# Altium PCB LYSZ-220526_s.PcbDoc
Units mil, origin at the board's own origin, x right, y up, seen from the top; angles counter-clockwise.
Board outline 3123 x 1109 mil, 2 copper layers (Top Layer, Bottom Layer); 63 components, 60 nets, 315 pads, 149 vias.
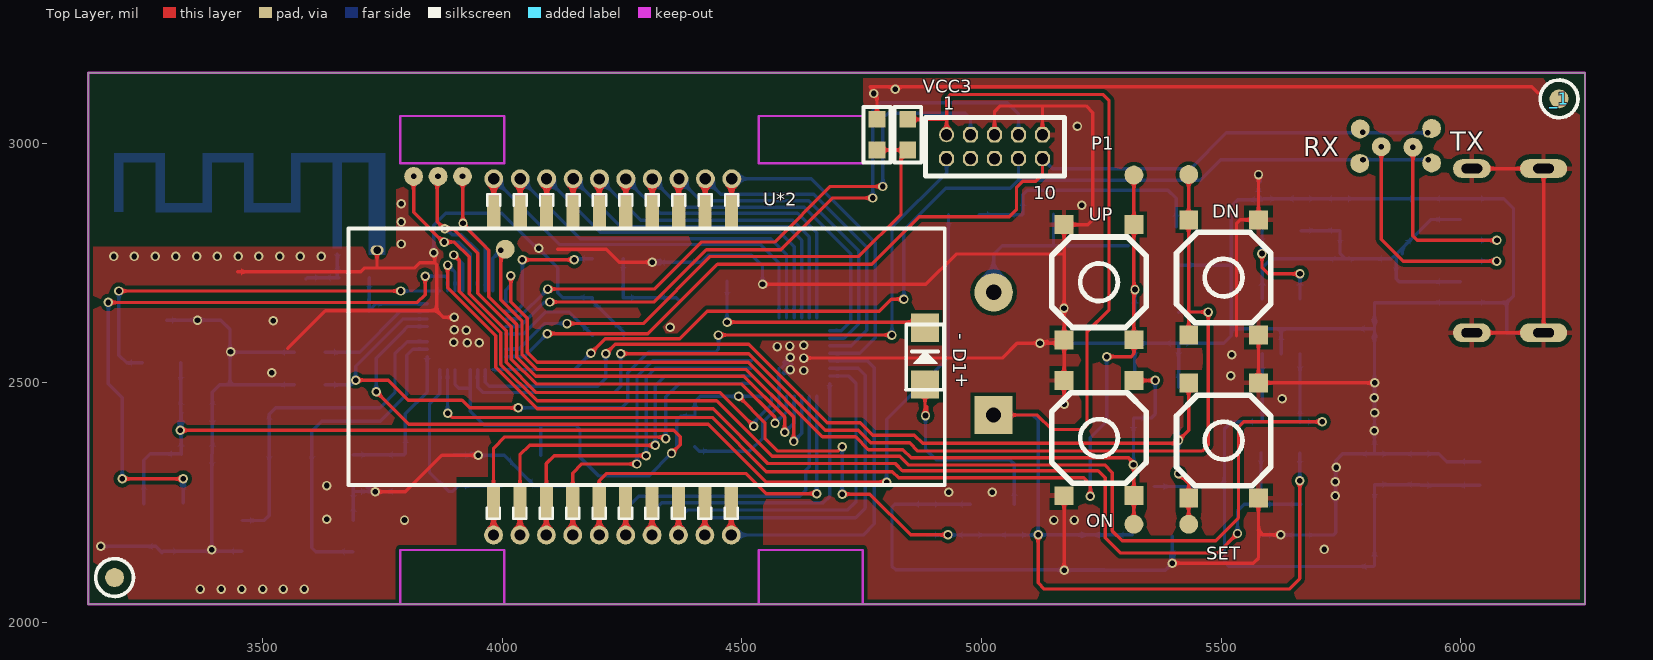
[diagram p0: Top Layer view]
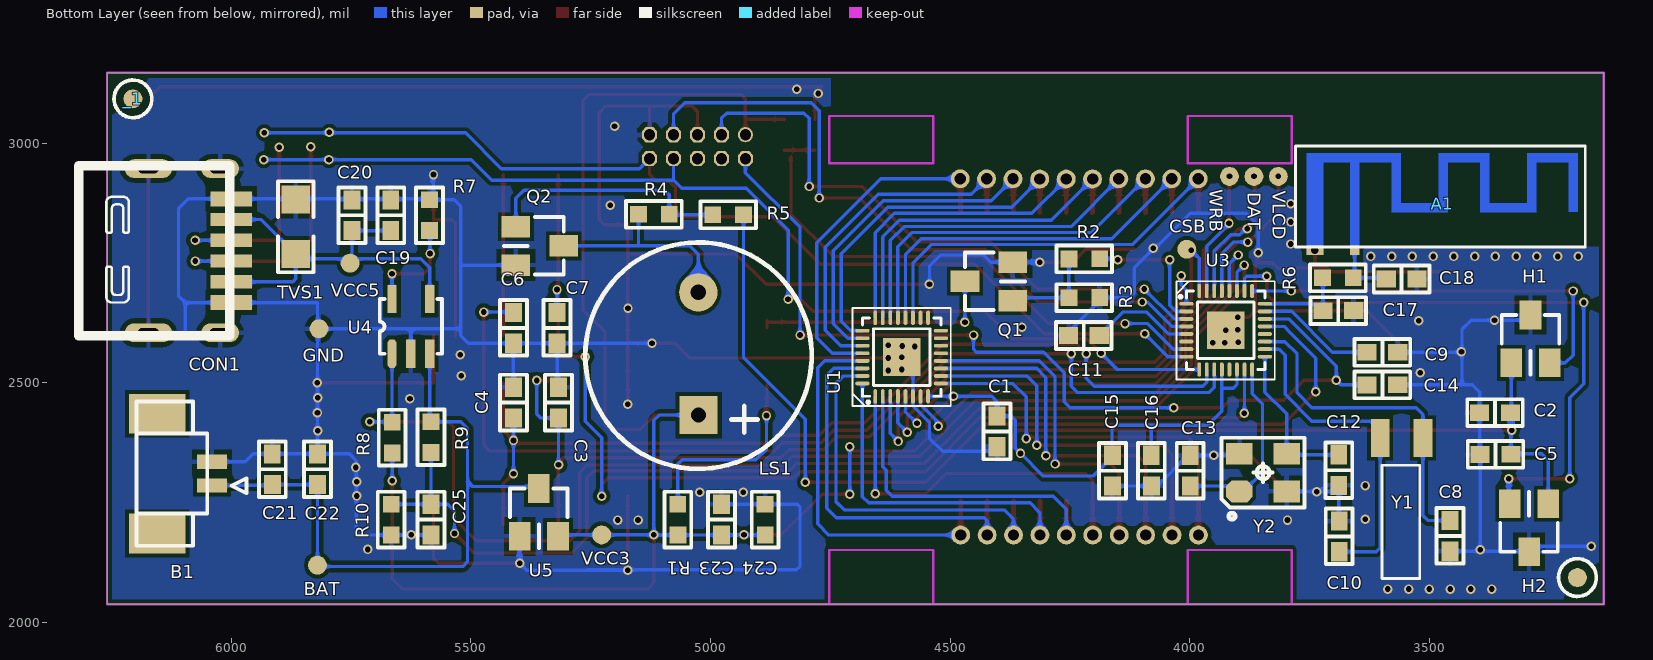
[diagram p1: Bottom Layer view, seen from below]
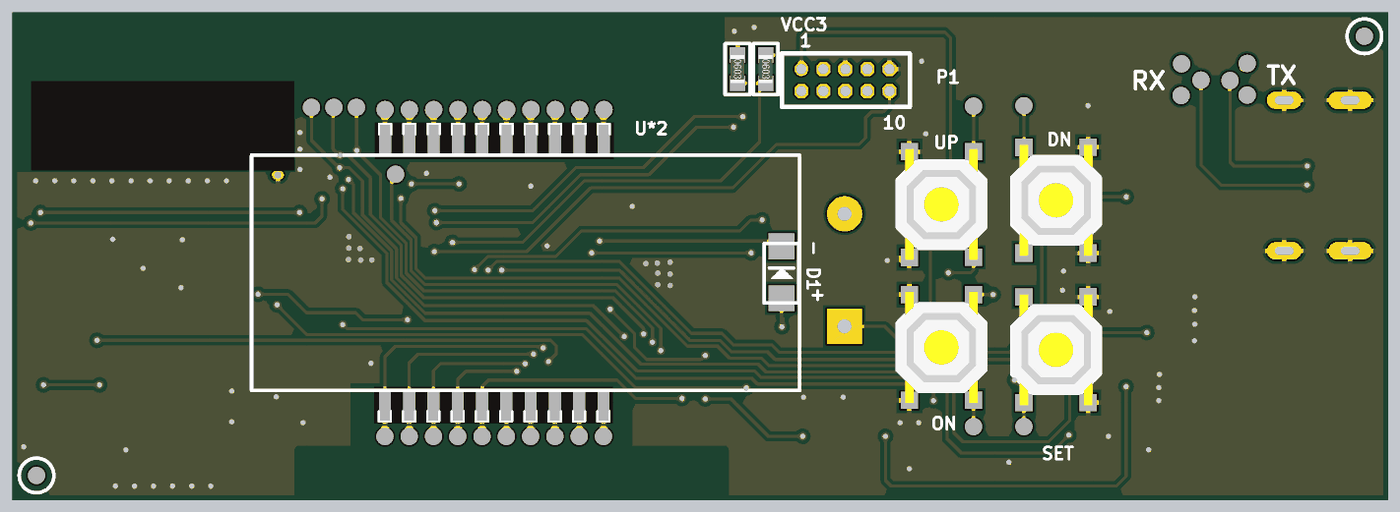
[diagram p2: 3D render of the assembled board from above, using the file's embedded part models]
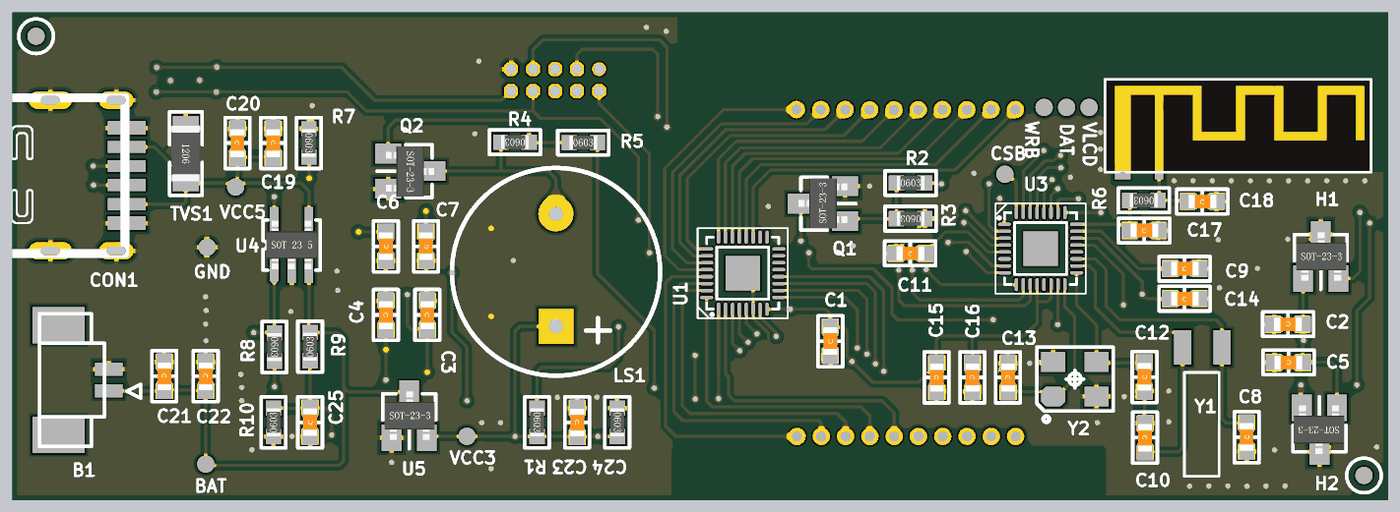
[diagram p3: 3D render of the assembled board from below, using the file's embedded part models]

## Layer stack, top to bottom
Top Solder: solder mask 0.4, Solder Resist, Dk 3.5
Top Layer: signal copper 1.4
Dielectric 1: dielectric 12.6, FR-4, Dk 4.8
Bottom Layer: signal copper 1.4
Bottom Solder: solder mask 0.4, Solder Resist, Dk 3.5

## Board outline
3136,2038 3136,3147 6259,3147 6259,2038

## Design rules (kind name [scope] priority, off if disabled: settings)
Clearance [All] p1: gap=8 ignorepadtopadclearanceinfootprint=FALSE
PolygonConnect PolygonConnect_1 [All vs IsVia] p1: connectstyle=Direct reliefconductorwidth=10 reliefentries=4 polygonreliefangle="90 Angle" airgapwidth=10
PolygonConnect [All] p2: connectstyle=Relief reliefconductorwidth=10 reliefentries=4 polygonreliefangle="90 Angle" airgapwidth=10
RoutingVias [All] p1: holewidth=11.81 width=19.68 viastyle="Through Hole" minholewidth=11.81 minwidth=19.68 maxholewidth=11.81 maxwidth=19.68
SilkToBoardRegionClearance [All] p1 off:
SilkToSilkClearance [All] p1 off: silktosilkclearance=10
SilkToSolderMaskClearance [IsPad] p1 off: minsilkscreentomaskgap=10 clearancetoexposedcopper=TRUE
SolderMaskExpansion [All] p1 off: expansion=4
Width [All] p1: maxlimit=20 minlimit=7 preferedwidth=7
27 further rules are at their usual default settings.

## Classes and differential pairs
component class Designator: B1 C19 C20 C21 C22 C23 C24 C25 CON1 R7 R8 R9 R10 TVS1 U4 U5

## Components (designator, comment, footprint, x,y, rotation, side; value= is the part's Value field where it differs from the comment)
_1 "" MAK 6205,3092.77 r270 top
_1 "" MAK 6205,3092.77 r270 bottom
A1 "2_0.4G_PIFA_F" BT-ANT 3656,2777 r0 bottom
B1 "Battery 4.2V" JP2S 6097,2311 r0 bottom
C1 "Cap" 0603-C 4402,2399 r90 bottom
C2 "Cap" 0603-C 3363,2438 r0 bottom
C3 "Cap" 0603-C 5317,2459 r270 bottom
C4 "Cap" 0603-C 5411,2459 r270 bottom
C5 "Cap" 0603-C 3362,2351 r0 bottom
C6 "Cap" 0603-C 5411,2615 r90 bottom
C7 "Cap" 0603-C 5320,2615 r90 bottom
C8 "Cap" 0603-C 3457,2181 r90 bottom
C9 "Cap" 0603-C 3598,2564 r180 bottom
C10 "Cap" 0603-C 3688,2180 r270 bottom
C11 "Cap" 0603-C 4221,2599 r180 bottom
C12 "Cap" 0603-C 3689,2318 r90 bottom
C13 "Cap" 0603-C 3999,2317 r270 bottom
C14 "Cap" 0603-C 3598,2496 r180 bottom
C15 "Cap" 0603-C 4161,2317 r270 bottom
C16 "Cap" 0603-C 4080,2317 r270 bottom
C17 "Cap" 0603-C 3690,2651 r180 bottom
C18 "Cap" 0603-C 3558,2717 r180 bottom
C19 "100nF" 0603-C 5667,2850 r270 bottom
C20 "4.7uF" 0603-C 5748,2850 r270 bottom
C21 "10UF" 0603-C 5914,2320 r270 bottom
C22 "100nF" 0603-C 5820,2320 r270 bottom
C23 "10uF" 0603-C 4976.91,2214.88 r270 bottom
C24 "100nF" 0603 4885.82,2214.88 r270 bottom
C25 "100nF" 0603-C 5583,2214.88 r90 bottom
CON1 "CON5" USB-C 6086,2776 r0 bottom
D1 "LED" LED-3020 4882,2556 r270 top
DN "Down_key" KEY-SMD5.2 5505,2720 r270 top
H1 "SV236" SOT-23 3289,2592 r180 bottom
H2 "SV236" SOT-23 3292,2198 r0 bottom
LS1 "Bell" BELL12*6 5025,2561 r90 bottom
ON "Power_key" KEY-SMD5.2 5245,2385 r90 top
P1 "Debug connecter 1.27mm" SIP5-1.27 5027,2993 r0 top
Q1 "8050" SOT-23 4419,2712 r90 bottom
Q2 "8050" SOT-23 5356,2786 r270 bottom
R1 "Res2" 0603 5068,2214.88 r270 bottom
R2 "Res2" 0603 4220,2759 r180 bottom
R3 "100K" 0603 4220,2678 r0 bottom
R4 "100K" 0603 5118,2852 r0 bottom
R5 "Res2" 0603 4963,2851 r180 bottom
R6 "0" 0603 3690.84,2719.5 r0 bottom
R7 "10K" 0603 5586,2850 r270 bottom
R8 "1M" 0603 5664,2386 r270 bottom
R9 "1M" 0603 5583,2387 r90 bottom
R10 "1M" 0603 5666,2214.88 r90 bottom
SET "Set_key" KEY-SMD5.2 5505,2380 r270 top
TVS1 "TVS" 1206 5865,2826 r270 bottom
U1 "U*" QFN32-4*4 4601,2554 r90 bottom
U3 "U*" QFN32-4*4 3925,2610 r180 bottom
U4 "SV4054" SOT-25 5625,2618 r180 bottom
U5 "XC6206P302" SOT-23 5358,2230 r180 bottom
U*2 "DY10550-TTA" LCD-20-1.4 4230,2555 r0 top locked
UP "Up_key" KEY-SMD5.2 5245,2710 r90 top
Y1 "32.768kHz" 32768 3558,2385 r90 bottom
Y2 "16MHz" JZ-3225 3847,2313 r90 bottom
? "" MAK 3191,2094 r270 bottom
? "" MAK 3191,2094 r270 top
? "" 0603 4782,3018 r270 top
? "" 0603 4846,3018 r270 top

## Footprints (in the part's own frame and the unit in brackets; to place one, negate y for a bottom-side part, rotate by r counter-clockwise, add the part's x,y. Pads: shape width x height; smd on the part's side, far side on the other; paste and mask are expansions set on the pad)
0603 [mil]
  rect 35x35 smd: 1(-32.09,-0.07) 2(32.09,0.07)
  silkscreen extent -58,-28 58,28, body extent -32,-16 31,16, height 18
0603-C [mil]
  rect 40x35 smd: 1(-32.09,-0.07) 2(32.09,0.07)
  silkscreen extent -58,-28 58,28, body extent -51,-19 52,20, height 35
1206 [mil]
  rect 58x60 smd: 1(-57,0) 2(57,0)
  silkscreen extent -95,-37 95,37, body extent -63,-32 63,31, height 24
32768 [mm]
  rect 2x1 smd: 1(0,1.13) 2(0,-1.13)
  silkscreen extent -7.44,-0.97 -1.44,1.03
BELL12*6 [mil]
  rect 80x80 hole 32: 1(-127.95,-0.16)
  round 80 hole 32: 2(127.95,0.16)
  silkscreen extent -240,-236 232,236, body extent -237,-236 233,236, height 354
BT-ANT [mm]
  rect 0.5x0.5 smd: 1(0,0)
  rect 0.9x0.5 on Bottom Solder: 2(2.1,0)
  oval 0.7x0.5 hole 0.4: 2(2.1,0)
  rect 0.9x0.5 smd: 2(2.1,0)
  rect 0.5x0.5 on Bottom Solder: ""(-11.6,-4.9) ""(-11.59,-2.29) ""(-9.4,-4.9) ""(-9.4,-2.26) ""(-6.9,-2.26) ""(-6.9,-4.9) ""(-4.7,-4.9) ""(-4.7,-2.26) ""(-2.2,-4.9) ""(-2.2,-2.26) ""(0,-4.4) ""(0,0) ""(2.3,-4.9)
  Top Layer region: -6.65,-2.01 -6.65,-5.15 -7.15,-5.15 -7.15,-2.01
  Top Layer region: -4.449,-4.65 -4.449,-5.15 -7.15,-5.15 -7.15,-4.65
  Top Layer region: -4.449,-2.01 -4.449,-5.15 -4.95,-5.15 -4.95,-2.01
  Top Layer region: -1.951,-2.01 -1.951,-2.51 -4.951,-2.51 -4.951,-2.01
  Top Layer region: 2.547,0.253 2.547,-5.147 1.648,-5.147 1.648,0.253
  Top Layer region: 0.251,-0.092 0.251,-4.9 -0.25,-4.9 -0.25,-0.092
  Top Layer region: -1.948,-2.013 -1.948,-5.153 -2.448,-5.153 -2.448,-2.013
  Top Layer region: -9.15,-2.01 -9.15,-5.15 -9.65,-5.15 -9.65,-2.01
  Top Layer region: -9.65,-2.51 -9.65,-2.01 -6.949,-2.01 -6.949,-2.51
  Top Layer region: -9.153,-4.651 -9.153,-5.15 -11.853,-5.15 -11.853,-4.651
  Top Layer region: -11.347,-2.025 -11.347,-5.155 -11.847,-5.155 -11.847,-2.025
  Top Layer lines w0.5: -2.2,-4.9 2.3,-4.9
  silkscreen extent -12.23,-5.53 3.12,-0.18
JP2S [mm]
  rect 1.6x0.75 smd: 1(-1.45,0.625) 2(-1.45,-0.625)
  rect 3x2.1 smd: ""(1.45,-3.175) ""(1.45,3.175)
  silkscreen extent -3.28,-3.82 2.55,3.83
JZ-3225 [mm]
  oct 1.15x1.4 smd: 1(-1,1.25)
  rect 1.15x1.4 smd: 2(-1,-1.25) 3(1,-1.25) 4(1,1.25)
  silkscreen extent -2.47,-2.2 1.85,2.2
KEY-SMD5.2 [mm]
  rect 1x1 smd: 1(-3.045,-1.85) 1(3.055,-1.85) 2(-3.055,1.85) 2(3.055,1.85)
  silkscreen extent -2.39,-2.5 2.41,2.5, body extent -3.2,-2.63 3.2,2.62, height 1.5
LCD-20-1.4 [mm]
  rect 0.7x1.8 smd: 1(-6.305,-7.64) 2(-4.905,-7.64) 3(-3.505,-7.64) 4(-2.105,-7.64) 5(-0.705,-7.64) 6(0.695,-7.64) 7(2.095,-7.64) 8(3.495,-7.64) 9(4.895,-7.64) 10(6.295,-7.64) 11(6.305,7.64) 12(4.905,7.64) 13(3.505,7.64) 14(2.105,7.64) 15(0.705,7.64) 16(-0.695,7.64) 17(-2.095,7.64) 18(-3.495,7.64) 19(-4.895,7.64) 20(-6.295,7.64)
  silkscreen extent -6.66,-8.6 6.66,8.6
LED-3020 [mm]
  rect 1.5x1.5 smd: A(1.5,0) K(-1.5,0)
  silkscreen extent -1.68,-1 1.78,1, body extent -2.36,-0.77 1.84,0.83, height 1
MAK [mm]
  round 1 smd: ""(0,0)
  Top Layer pour cut-out: -1,0 -0.924,-0.383 -0.707,-0.707 -0.383,-0.924 0,-1 0,-1 0.383,-0.924 0.707,-0.707 0.924,-0.383 1,0 1,0 0.924,0.383 0.707,0.707 0.383,0.924 0,1 0,1 -0.383,0.924 -0.707,0.707 -0.924,0.383 -1,0
  silkscreen extent -1,-1 1,1
QFN32-4*4 [mm]
  oval 0.76x0.2 smd: 1(-2.08,1.4) 2(-2.08,1) 3(-2.08,0.6) 4(-2.08,0.2) 5(-2.08,-0.2) 6(-2.08,-0.6) 7(-2.08,-1) 8(-2.08,-1.4) 17(2.08,-1.4) 18(2.08,-1) 19(2.08,-0.6) 20(2.08,-0.2) 21(2.08,0.2) 22(2.08,0.6) 23(2.08,1) 24(2.08,1.4)
  oval 0.2x0.76 smd: 9(-1.4,-2.08) 10(-1,-2.08) 11(-0.6,-2.08) 12(-0.2,-2.08) 13(0.2,-2.08) 14(0.6,-2.08) 15(1,-2.08) 16(1.4,-2.08) 25(1.4,2.08) 26(1,2.08) 27(0.6,2.08) 28(0.2,2.08) 29(-0.2,2.08) 30(-0.6,2.08) 31(-1,2.08) 32(-1.4,2.08)
  rect 2x2 smd: 33(0,0)
  silkscreen extent -2.6,-2.6 2.6,2.6
SIP5-1.27 [mm]
  round 0.8 hole 0.6: 1(-2.54,0.635)
  oct 0.8x0.8 hole 0.6: 2(-2.54,-0.635) 3(-1.27,0.635) 4(-1.27,-0.635) 5(0,0.635) 6(0,-0.635) 7(1.27,0.635) 8(1.27,-0.635) 9(2.54,0.635) 10(2.54,-0.635)
  silkscreen extent -3.66,-1.55 3.71,1.55
SOT-23 [mil]
  rect 45x60 smd: 1(-40,-50) 2(0,50) 3(40,-50)
  silkscreen extent -60,-75 60,50, body extent -56,-55 58,55, height 47
SOT-25 [mm]
  oct 0.5x1.5 smd: 1(-1,-1.45)
  rect 0.5x1.5 smd: 2(0,-1.45) 3(1,-1.45) 4(1,1.45) 5(-1,1.45)
  silkscreen extent -1.65,-1.45 1.65,1.45, body extent -1.45,-1.4 1.45,1.4, height 1.2
USB-C [mm]
  rect 2.2x0.8 smd: 1(-2.2,2.75) 6(-2.2,-2.75)
  rect 2.2x0.7 smd: 2(-2.2,1.65) 3(-2.2,0.55) 4(-2.2,-0.55) 5(-2.2,-1.65)
  oval 2x1 hole 0.5 slot 1.1 at 0 deg: ""(-1.6,-4.35) ""(-1.6,4.35)
  oval 2.5x1 hole 0.5 slot 1.1 at 0 deg: ""(2.2,4.35) ""(2.2,-4.35)
  silkscreen extent -2.1,-4.5 5.9,4.5

## Part data
B1: library part Battery, "Multicell Battery"
C1 C2 C3 C4 C5 C6 C7 C8 C9 C10 C11 C12 C13 C14 C15 C16 C17 C18: "Capacitor"
C19 C20 C21 C22 C23 C24 C25: library part CAP, "Capacitor"
CON1: "Connector"
DN ON SET UP: library part SW-PB, "Switch"
H1 H2: library part "霍尔44E 938"
LS1: "Electrical Bell"
P1: library part "Header 5X2", "Header, 5-Pin, Dual row"
Q1 Q2: library part NPN, "NPN Transistor"
R1 R2 R5: "Resistor"
R3 R4 R6: library part Res2, "Resistor"
R7: library part Res2, "1%@100mA"
R8 R9 R10: library part Res2
U1: library part VK1088
U3: library part PHY6222
Y1 Y2: library part XTAL, "Crystal Oscillator"

## Free pads (board coordinates)
  round 39.37 smd: 0(3982.17,2926) 1(4037.37,2926) 2(4092.57,2926) 3(4147.78,2926) 4(4202.98,2926) 5(4258.18,2926) 6(4313.39,2926) 7(4368.59,2926) 8(4423.8,2926) 9(4479,2926) 10(3981.77,2182.77) 11(4036.89,2182.77) 12(4092.01,2182.77) 13(4147.13,2182.77) 14(4202.24,2182.77) 15(4257.36,2182.77) 16(4312.48,2182.77) 17(4367.6,2182.77) 18(4422.72,2182.77) 19(4477.83,2182.77) 40(5790,3030) 41(5834,2993) 42(5789,2958) 43(5939,3031) 44(5900,2992) 45(5939,2959) 46(3917,2931) 47(3866,2931) 48(3815,2931) 49(4006,2779) 58(5317.83,2933.83) 59(5432.17,2934.83) 60(5317.83,2205.17) 61(5432.17,2205.17)
  round 39.37 hole 23.62: 20(3982.17,2926) 21(4037.37,2926) 22(4092.4,2925.83) 23(4147.78,2926) 24(4202.64,2925.66) 25(4257.76,2925.57) 26(4312.87,2925.49) 27(4368.59,2926) 28(4423.8,2926) 29(4479,2926) 30(4477.83,2182.77) 31(4422.72,2182.77) 32(4367.6,2182.77) 33(4312.48,2182.77) 34(4257.36,2182.77) 35(4202.24,2182.77) 36(4147.13,2182.77) 37(4092.01,2182.77) 38(4036.89,2182.77) 39(3981.77,2182.77)
  round 39.37 smd far side: 50(4006,2779) 51(3917,2931) 52(3866,2931) 53(3815,2931) 54(5752,2750) 55(5816.73,2613) 56(5819.93,2119.93) 57(5227,2183)

## Via types
v1: diameter 19.68, hole 11.81, Top Layer to Bottom Layer, tented both sides, 149 vias

## Nets (pads, with @x,y where several pads share a name; then routed paths per layer and width w, separated by ;. In a path a pad name is that pad's centre, name@x,y a point inside that pad or via, vN(x,y) a via of type N, cw(c..) or ccw(c..) an arc to the next point about the centre after c; other vN are vias at no path point)
BAT_ADC: C25.2 R9.1 R10.2 U3.27 | length 2406.5
  Top Layer w7: v1(3886,2746) 3886,2699 3986,2599 3986,2533 4073,2446 4440,2446 4554,2332 4820,2332 4835,2317 5243,2317 5258,2302 5258,2176.83 5289.49,2145.34 5493.34,2145.34 v1(5534,2186)
  Bottom Layer w7: v1(3886,2746) 3901.38,2730.62 U3.27 ; v1(5534,2186) 5534,2233 5547.97,2246.97 C25.2 ; R9.1 5583.07,2354.78 C25.2 ; R10.2 C25.2
CHRG: R8.1 U3.28 U4.1 | length 2692.9
  Top Layer w7: v1(3899,2767) 3910,2756 3910,2691.44 3997,2604.44 3997,2538.44 4072.44,2463 4447,2463 4563,2347 4829,2347 4847,2329 5257,2329 5273,2313 5273,2191.14 5293.41,2170.73 5488.54,2170.73 5536,2218.18 5536,2408 5547,2419 v1(5711,2419)
  Bottom Layer w7: v1(3899,2767) 3917.13,2748.87 U3.28 ; U4.1 5664.37,2418.39 5664.98,2419 v1(5711,2419)
GND: ?.1@4781.93,3050.09 A1.2@3738.68,2777 B1.2 C1.1 C2.2 C3.1 C4.1 C5.2 C6.1 C7.1 C8.1 C9.2 C10.1 C11.1 C12.1 C13.1 C14.2 C15.2 C16.2 C17.2 C18.2 C19.1 C20.1 C21.1 C22.1 C23.1 C24.1 C25.1 CON1. CON1.1 CON1.6 DN.2 H1.2 H2.2 ON.2 P1.5 P1.9 pad.55 Q1.3 Q2.3 R3.1 R7.1 R10.1 SET.2 TVS1.1 U1.6 U1.33 U3.33 U4.2 U5.1 UP.2 Y2.2 Y2.4 | length 14676.2
  Top Layer w7: 3448,2732 3705,2732 3713,2740 3817,2740 3828,2751 3859,2751 ; 3552,2572 3631,2651 3863,2651 ; v1(3735,2273) 3798,2273 3874.09,2349.09 v1(3950,2349.09) ; 3738.68,2740.32 A1.2@3738.68,2777 ; v1@3859,2772 3859,2751 ; v1(3900,2637) 3877,2637 3863,2651 ; 4116,2779 4217,2779 4244,2752 v1(4313,2752) ; v1(4543,2706) 4884,2706 4947,2769 5170.17,2769 ; v1(4629,2552) 5043,2552 5073.91,2582.91 v1(5121.91,2582.91) 5165.35,2582.91 UP.2@5172.17,2589.72 ; ?.1@4781.93,3050.09 4781.93,3104.07 4768,3118 6148,3118 6160.5,3105.5 ; P1.5 5027,3066 5039,3078 5218,3078 5232,3064 5232,2841 5221.28,2830.28 5172.17,2830.28 UP.2@5172.17,2589.72 ; v1@5125.09,2588.41 ccw(c5132.74,2601.67) 5136.71,2586.88 ccw(c5140.67,2572.09) v1@5127.41,2579.74 ; P1.9 5127,3076.5 ; v1(5172.17,2109.17) ON.2@5172.17,2264.72 ; v1(5172.17,2455.83) 5172.17,2505.28 UP.2@5172.17,2589.72 ; v1(5398,2124) 5567,2124 5577.83,2134.83 5577.83,2192.17 ; 5532,2598 5532,2833 5539.28,2840.28 5577.83,2840.28 v1(5577.83,2934.83) ; SET.2@5577.83,2259.72 5577.83,2192.17 ; DN.2@5577.83,2599.72 5577.83,2500.28 v1(5820.28,2500.28) ; v1(5624,2183) 5587,2183 5577.83,2192.17 ; CON1.@6023.01,2604.74 6172.61,2604.74 6172.61,2947.26 CON1.@6023.01,2947.26 ; 3859,2751 3863,2747 3863,2651
  Bottom Layer w7: v1(3162,2159) 3277,2159 H2.2@3290,2146 ; H2.2@3292.91,2148.91 v1@3394.09,2148.91 ; H1.2@3299.93,2631.07 3412.42,2631.07 3431.91,2611.57 3431.91,2496.07 ; v1@3431.98,2564.07 C9.2 ; C8.1 v1@3394.09,2148.91 ; C14.2 3431.91,2496.07 ; C10.1@3688.93,2212.95 C12.1 ; C12.1@3689.56,2273.63 Y2.2 ; 3718.3,2281.71 cw(c3710.34,2263.13) v1@3729.11,2270.64 ; 3724.68,2278.98 ccw(c3728.77,2288.55) v1@3732.64,2278.89 ; v1(3857,2772) 3857,2829.18 3882.16,2854.34 3998.66,2854.34 v1@4074,2779 ; Y2.4@3899.5,2349.09 v1(3950,2349.09) C13.1 4003.91,2349.09 4068.09,2284.91 C16.2 C15.2 ; v1@3944.51,2345.91 ccw(c3931.25,2338.26) 3935.21,2353.05 ccw(c3939.17,2367.84) v1@3946.83,2354.58 ; v1(4076.07,2781.13) 4076.07,2779.93 4116,2740 4116,2688 4125.93,2678.07 R3.1 4187.91,2671.09 4253.09,2605.91 C11.1 ; v1(4313,2752) Q1.3 4415,2752 4430,2767 4520,2767 4543,2744 v1(4543,2706) ; v1@4316.17,2746.51 cw(c4324.99,2731.23) 4329.55,2748.27 ; v1@4316.17,2757.49 ccw(c4324.99,2772.77) 4329.55,2755.73 ; C1.1 4411.11,2357.74 4515.74,2357.74 4543,2385 4543,2418 4577.38,2452.38 U1.6 U1.33@4577.38,2530.38 ; U1.33@4584.49,2533.07 ccw(c4570.63,2552.73) U1.33@4594.66,2553.73 ; U1.33@4586.15,2521.59 cw(c4600.27,2511.07) U1.33@4601.03,2528.66 ; U1.33@4587.31,2543.33 ccw(c4576.84,2558.19) U1.33@4594.75,2555.08 ; U1.33@4588.45,2519.32 cw(c4597.02,2507.16) U1.33@4599.81,2521.77 ; U1.33@4588.66,2519.47 ccw(c4580.1,2531.62) U1.33@4594.75,2529.08 ; U1.33@4590.62,2545.66 cw(c4597.79,2535.49) U1.33@4599.92,2547.75 ; U1.33@4594.97,2540.46 ccw(c4585.88,2553.37) U1.33@4601.66,2554.03 ; U1.33@4597.73,2517.57 ccw(c4587.07,2527.53) U1.33@4601.66,2528.02 ; U1.33@4600.4,2527.74 cw(c4608.61,2531.25) U1.33@4604.45,2539.16 ; C23.1 C24.1 4818.97,2246.97 4813,2241 4813,2118 4821,2110 5257,2110 ; v1(5121.91,2582.91) C7.1 ; v1(5172.17,2109.17) 5383.17,2109.17 v1(5398,2124) U5.1 ; C3.1 5319.93,2493.95 C7.1 ; v1@5392.51,2127.17 ccw(c5377.23,2135.99) 5394.27,2140.55 ; 5401.73,2140.55 ccw(c5418.77,2135.99) v1@5403.49,2127.17 ; Q2.3 5516,2746 ; C4.1 5411.07,2582.78 C6.1 ; v1@5574.66,2929.34 cw(c5567.01,2916.08) 5581.79,2920.04 cw(c5596.59,2924) v1@5583.33,2931.66 ; v1(5577.83,2934.83) 5577.83,2890.32 R7.1 ; C25.1 R10.1 5733.8,2182.8 5739,2188 5739,2338 5753.09,2352.09 C22.1 ; U4.2 5625,2613 ; pad.55 5625,2613 ; B1.2 5970.39,2335.61 5953.91,2352.09 C21.1 C22.1 ; CON1.@6172.61,2604.73 6095.73,2604.73 6095.73,2667.73 ; v1@3394.09,2148.91 C5.2 3395.09,2351.93 C2.2 3395.09,2481.09 3410.07,2496.07 3431.91,2496.07 ; C7.1 C6.1 ; C6.1 5504.91,2582.91 5521,2599 5521,2613 ; 5521,2613 5521,2869 5534.09,2882.09 R7.1 ; 5521,2613 5625,2613 ; R7.1 5588.25,2884.27 CON1.6 6089.73,2884.27 6110,2864 6110,2682 6095.73,2667.73 ; C22.1 5819.73,2352.42 5819.73,2667.73 CON1.1 6095.73,2667.73
  other v1: 3370,2070 3413.3,2070 3456.6,2070 3499.9,2070 3543.2,2070 3586.5,2070 3394,2152 5715,2152.7 3796,2214 5151,2214 5193.27,2214 3634,2216 5738.28,2264.28 4931.81,2272 5022,2272 3634,2286 5738.28,2294 5740,2323.79 5819.28,2400.28 5820,2438 5627,2467 5819.28,2469.18 5520,2515 3519,2521 4629,2526 4601,2528 4601,2554 5522,2558.82 3433,2565 4574,2576 4600,2577 4629,2579 3927,2584 3952,2584 3899,2585 3925,2610 3900,2611 4350,2616 3522,2630 3364,2631 5172,2656 3189,2764 3232.3,2764 3275.6,2764 3318.9,2764 3362.2,2764 3405.5,2764 3448.8,2764 3492.1,2764 3535.4,2764 3578.7,2764 3622,2764 3789,2790 3789,2836 5209.31,2871 3789,2874 5200,3036 4775,3104 4820,3113
NetC3_2: C3.2 ON.1 pad.60 U3.1 | length 1984
  Top Layer w7: v1(4018,2724) 4018,2669 4052,2635 4052,2564 4073,2543 4513,2543 4668,2388 4737,2388 4764,2361 4836,2361 4853,2344 5307,2344 v1@5317.83,2333.17 ; pad.60 5317.83,2265.12 v1@5317.83,2329.07 ; ON.1@5317.83,2505.28 v1(5362.28,2505.28)
  Bottom Layer w7: U3.1 4006.89,2693.89 4018,2705 v1(4018,2724) ; v1(5316.93,2329.07) C3.2 5353.91,2426.91 5362.28,2435.28 v1(5362.28,2505.28)
NetC4_2: C4.2 pad.61 SET.1 U3.10 | length 1990.4
  Top Layer w7: v1(4216,2561) 4236,2581 4514,2581 4678,2417 4747,2417 4773,2391 4860,2391 4877,2374 5404.86,2374 v1(5410.93,2380.07) 5432.17,2401.3 SET.1@5432.17,2499.88 ; v1(5410.93,2310.93) 5432.17,2289.7 5432.17,2259.72 pad.61
  Bottom Layer w7: U3.10 3964.37,2501.63 3973,2493 4199,2493 4216,2510 v1(4216,2561) ; v1(5410.93,2310.93) v1(5410.93,2380.07) C4.2
NetC6_2: C6.2 DN.1 pad.59 U3.11 | length 2442.9
  Top Layer w7: v1(4247,2561) 4514,2561 4674,2401 4743,2401 4769,2375 4850,2375 4867,2358 5460,2358 5473,2371 v1(5473,2648) 5433.17,2648 ; DN.1@5432.17,2599.72 5432.17,2839.88 pad.59
  Bottom Layer w7: U3.11 3948.62,2491.38 3960,2480 4234,2480 4247,2493 v1(4247,2561) ; C6.2 5411.98,2648 v1(5473,2648)
NetC7_2: C7.2 pad.58 U3.15 UP.1 | length 2303.2
  Top Layer w7: v1(3886,2437) 3895,2428 4438,2428 4551,2315 4814,2315 4827,2302 5213,2302 5227,2288 v1(5227,2264) ; v1(5261,2555) 5312,2555 5317.83,2560.83 5317.83,2590.12 5317.83,2830.28 pad.58
  Bottom Layer w7: U3.15 3885.63,2437.37 v1(3886,2437) ; v1(5227,2264) 5227,2386 5261,2420 v1(5261,2555) ; C7.2 v1(5320.07,2694.93)
NetC9_1: C9.1 U3.23 | length 248.4
  Bottom Layer w7: C9.1 3702.1,2563.93 3787.54,2649.37 U3.23
NetC11_2: C11.2 U3.5 | length 221.3
  Bottom Layer w7: U3.5 4044.13,2602.13 4090,2648 4139.98,2648 C11.2
NetC15_1: 
NetC18_1: A1.1 C18.1 R6.1 | length 120.5
  Bottom Layer w7: C18.1 3592.72,2719.57 R6.1 3656,2722.33 A1.1@3656,2769.14
NetC19_2: C19.2 C20.2 CON1.2 CON1.5 pad.54 TVS1.2 U4.4 | length 877.9
  Bottom Layer w7: U4.4 5585.63,2740.63 5604,2759 pad.54@5759,2759 ; C19.2 C20.2 5747.93,2770.07 pad.54@5759,2759 ; TVS1.2@5877.5,2769 cw(c5907.68,2769) TVS1.2@5886.34,2790.34 ; CON1.2 5870.96,2711.04 5865,2717 TVS1.2 ; CON1.5 5936.96,2840.96 TVS1.2 ; pad.54@5759,2759 5855,2759 TVS1.2
NetD1_A: D1.A R1.1 | length 433.2
  Top Layer w7: D1.A 4882,2433 v1(4883,2432) ; 4885.89,2450.66 ccw(c4905.63,2446.02) v1@4888.39,2435.34
  Bottom Layer w7: v1(4883,2432) 4883,2362 4905,2340 5059,2340 5068.07,2330.93 R1.1
NetD1_K: D1.K Q1.2 | length 514.2
  Top Layer w7: v1(4469,2627) 4879,2627 4882,2630 D1.K
  Bottom Layer w7: v1(4469,2627) Q1.2
NetH1_3: H1.3 U3.25 | length 859.2
  Top Layer w7: v1(3200.11,2691.89) v1(3788.11,2691.89)
  Bottom Layer w7: v1(3200.11,2691.89) 3200.11,2557.89 3216,2542 H1.3 ; v1(3788.11,2691.89) U3.25
NetH2_3: H2.3 U3.26 | length 1377.1
  Top Layer w7: v1(3178,2668) 3823,2668 3839,2684 v1(3839,2723) ; v1(3207,2300) v1(3334,2300)
  Bottom Layer w7: v1(3178,2668) 3178,2498 3207,2469 v1(3207,2300) ; v1@3328.51,2296.83 cw(c3315.24,2289.17) 3330.04,2285.21 cw(c3344.83,2281.25) v1@3337.17,2294.51 ; H2.3@3334,2250 v1(3334,2300) ; 3337.66,2282.89 cw(c3355.4,2287.64) v1@3339.49,2296.83 ; v1(3839,2723) 3881,2723 3885.63,2718.37 U3.26
NetLS1_2: LS1.2 Q2.2 R4.2 | length 432.5
  Bottom Layer w7: LS1.2 5025.16,2768.16 5043,2786 5150.09,2786 Q2.2 ; 5150.09,2786.91 R4.2
NetQ1_1: Q1.1 R2.1 R3.2 | length 200.4
  Bottom Layer w7: R2.1 R3.2 4363.07,2677.93 Q1.1
NetQ2_1: Q2.1 R4.1 R5.1 | length 522
  Bottom Layer w7: R5.1 5084.78,2850.93 R4.1 5085.91,2892.91 5095,2902 5389,2902 5406,2885 Q2.1
NetR2_2: R2.2 U3.2 | length 282.1
  Top Layer w7: v1(4042,2757) v1(4150,2757)
  Bottom Layer w7: U3.2 4029.37,2649.37 4042,2662 v1(4042,2757) ; v1(4150,2757) 4152.07,2759.07 R2.2
NetR5_2: R5.2 U3.21 | length 1958.2
  Top Layer w7: v1(3737,2482) 3805,2414 4430,2414 4551,2293 v1(4802,2293)
  Bottom Layer w7: v1(3737,2482) 3737,2552 3790,2605 3802.87,2617.87 U3.21 ; v1(4802,2293) 4802,2424 4930.91,2552.91 R5.2
NetR7_2: R7.2 U4.5 | length 214.8
  Top Layer w7: v1(5585,2770) 5585,2741 5598.37,2727.63 v1(5664.37,2727.63)
  Bottom Layer w7: v1(5585,2770) 5585,2816.98 R7.2 ; U4.5 v1(5664.37,2727.63)
NetTP1_0: pad.49 pad.50 U1.3 U3.32 | length 1100.9
  Top Layer w7: v1(3997,2777) 3997,2674 4041,2630 4041,2559.44 4072.44,2528 4509,2528 4608,2429 v1(4608,2378)
  Bottom Layer w7: U3.32 3980.12,2760.12 v1(3997,2777) ; v1(4608,2378) 4624.62,2394.62 U1.3
NetTP2_0: pad.46 pad.51 U1.4 U3.31 | length 1315.2
  Top Layer w7: pad.46@3918,2936 3917.5,2935.5 3917.5,2833.5 v1(3918,2833) 3918,2831 3972,2777 3972,2680 4030,2622 4030,2554 4070,2514 4504,2514 4589,2429 v1(4589,2397)
  Bottom Layer w7: v1(3918,2833) 3918,2832 3964.37,2785.63 U3.31 ; v1(4589,2397) 4608.87,2416.87 U1.4
  other v1: 3917,2931
NetTP3_0: pad.47 pad.52 U1.5 U3.30 | length 1305.4
  Top Layer w7: pad.47@3864,2929 3864,2836 3878,2822 v1(3880,2822) 3881,2821 3899,2821 3949,2771 3949,2687.44 4019,2617.44 4019,2549.44 4070.44,2498 4499,2498 4569,2428 v1(4569,2416)
  Bottom Layer w7: v1(3880,2822) 3883.43,2822 3895.89,2809.54 3914.67,2809.54 3948.62,2775.59 U3.30 ; v1(4569,2416) 4593.13,2440.13 U1.5
  other v1: 3866,2931
NetTP4_0: pad.48 pad.53 U1.7 U3.29 | length 1272.8
  Top Layer w7: v1(3815,2931) 3815,2856 3877,2794 v1(3879,2794) 3900,2794 3931,2763 3931,2686 4008,2609 4008,2543 4071,2480 4455,2480 v1(4525,2410)
  Bottom Layer w7: v1(3879,2794) 3909,2794 3932.87,2770.13 U3.29 ; v1(4525,2410) 4525,2418 4561.63,2454.63 U1.7
NetU3_15: 
RF: C17.1 R6.2 U3.24 | length 195.7
  Bottom Layer w7: R6.2 3722.09,2718.59 C17.1 3736.09,2664.93 3750.93,2664.93 3751.12,2665.12 U3.24
RST_N: C14.1 P1.2 U3.22 | length 1960.8
  Top Layer w7: v1(3694,2506) 3762,2506 3804,2464 3916,2464 3932,2448 v1(4033,2448) ; v1(4451,2600) v1(4813,2600)
  Bottom Layer w7: C14.1 3683.93,2495.93 v1(3694,2506) 3694,2534.62 3793,2633.62 U3.22 ; v1(4033,2448) 4249,2448 4262,2461 4262,2521 4305,2564 4445,2564 4451,2570 v1(4451,2600) ; v1(4813,2600) 4813,2825 4927,2939 P1.2
SWCLK: P1.7 U3.4 | length 1423.7
  Top Layer w7: v1(4099,2669) 4317,2669 4426,2778 4581,2778 4689,2886 v1(4773,2886)
  Bottom Layer w7: U3.4 4037.87,2617.87 4089,2669 v1(4099,2669) ; v1(4773,2886) 4773,3068 4790,3085 5054,3085 5077,3062 P1.7
SWDIO: P1.3 U3.3 | length 1269.7
  Top Layer w7: v1(4095,2696) 4317,2696 4415,2794 4568,2794 4684,2910 v1(4794,2910)
  Bottom Layer w7: U3.3 4032.62,2633.62 v1(4095,2696) ; v1(4794,2910) 4794,3052 4805,3063 4966,3063 4977,3052 P1.3
TM: ?.2 U3.7 | length 1125.5
  Top Layer w7: v1(4135,2624) 4294,2624 4434,2764 4744,2764 4832,2852 ?.2@4832,2971.84 ; ?.2@4782.07,2985.91 ?.2@4846.07,2985.91
  Bottom Layer w7: U3.7 4034.63,2570.63 4088,2624 v1(4135,2624)
TTA-COM0: pad.10 pad.39 U1.9 U*2.1 | length 828
  Top Layer w7: U*2.1 3981.77,2363.77 4005.34,2387.34 4337.66,2387.34 v1(4341,2384)
  Top Layer w10: pad.10 U*2.1
  Bottom Layer w7: v1(4341,2384) 4341,2471 4368.88,2498.88 U1.9
TTA-COM1: pad.11 pad.38 U1.10 U*2.2 | length 790.2
  Top Layer w7: U*2.2 4036.89,2349.89 4057,2370 v1(4319,2370)
  Top Layer w10: pad.11 U*2.2
  Bottom Layer w7: v1(4319,2370) 4319,2494 4339.63,2514.63 U1.10
TTA-COM2: pad.12 pad.37 U1.11 U*2.3 | length 754.3
  Top Layer w7: U*2.3 4092.01,2332.01 4108.34,2348.34 4299.66,2348.34 v1(4300,2348)
  Top Layer w10: pad.12 U*2.3
  Bottom Layer w7: v1(4300,2348) 4300,2511 4319.38,2530.38 U1.11
TTA-COM3: pad.13 pad.36 U1.12 U*2.4 | length 704.9
  Top Layer w7: U*2.4 4147.13,2312.13 4166,2331 v1(4281,2331)
  Top Layer w10: pad.13 U*2.4
  Bottom Layer w7: v1(4281,2331) 4281,2513 4314.13,2546.13 U1.12
TTA-SEG0: pad.14 pad.35 U1.1 U*2.5 | length 793.9
  Top Layer w7: U*2.5 4202.24,2296.24 4217,2311 4509,2311 4551,2269 v1(4656,2269)
  Top Layer w10: pad.14 U*2.5
  Bottom Layer w7: v1(4656,2269) 4656,2324.88 4656.12,2325 U1.1
TTA-SEG1: pad.15 pad.34 U1.2 U*2.6 | length 716.2
  Top Layer w10: pad.15 U*2.6
  Bottom Layer w7: pad.34 4257.36,2236.36 4285,2264 4621,2264 4633,2276 4633,2318 4640.37,2325.37 U1.2
TTA-SEG2: pad.16 pad.33 U1.32 U*2.7 | length 738.4
  Top Layer w10: pad.16 U*2.7
  Bottom Layer w7: pad.33 4312.48,2229.48 4333,2250 4670,2250 4682.89,2262.89 U1.32
TTA-SEG3: pad.17 pad.32 U1.31 U*2.8 | length 798.3
  Top Layer w10: pad.17 U*2.8
  Bottom Layer w7: pad.32 4367.6,2215.6 4387,2235 4721,2235 4738,2252 4738,2499 4722.37,2514.63 U1.31
TTA-SEG4: pad.18 pad.31 U1.30 U*2.9 | length 803.8
  Top Layer w10: pad.18 U*2.9
  Bottom Layer w7: pad.31 4422.72,2213 4428.72,2219 4737,2219 4757,2239 4757,2516 4742.62,2530.38 U1.30
TTA-SEG5: pad.19 pad.30 U1.29 U*2.10 | length 802.8
  Top Layer w10: pad.19@4477.83,2184.17 U*2.10
  Bottom Layer w7: pad.30 4752.77,2182.77 4776,2206 4776,2532 4761.87,2546.13 U1.29
TTA-SEG6: pad.9 pad.29 U1.28 U*2.11 | length 730.7
  Top Layer w10: U*2.11 pad.9@4478.23,2925.23
  Bottom Layer w7: pad.29 4644.43,2926 4778,2792.43 4778,2593.87 4746,2561.87 U1.28
TTA-SEG7: pad.8 pad.28 U1.27 U*2.12 | length 729.6
  Top Layer w10: U*2.12 pad.8@4423.11,2925.31
  Bottom Layer w7: pad.28 4455.8,2894 4650,2894 4760.38,2783.62 4760.38,2610 4728,2577.62 U1.27
TTA-SEG8: pad.7 pad.27 U1.26 U*2.13 | length 732.4
  Top Layer w10: U*2.13 pad.7@4367.99,2925.4
  Bottom Layer w7: pad.27 4414.45,2880.14 4639.86,2880.14 4743.63,2776.37 4743.63,2624 4713,2593.37 U1.26
TTA-SEG9: pad.6 pad.26 U1.25 U*2.14 | length 741.5
  Top Layer w10: U*2.14 pad.26
  Bottom Layer w7: pad.26 4371.36,2867 4630,2867 4727,2770 4727,2629.12 4707,2609.12 U1.25
TTA-SEG10: pad.5 pad.25 U1.24 U*2.15 | length 692.4
  Top Layer w10: U*2.15 pad.25
  Bottom Layer w7: pad.25 4329.33,2854 4616,2854 4656.12,2813.88 U1.24
TTA-SEG11: pad.4 pad.24 U1.23 U*2.16 | length 726.5
  Top Layer w10: U*2.16 pad.24
  Bottom Layer w7: pad.24 4289.09,2839.21 4605.79,2839.21 4640.37,2804.63 U1.23
TTA-SEG12: pad.3 pad.23 U1.22 U*2.17 | length 761.6
  Top Layer w10: U*2.17 pad.3@4147.52,2925.74
  Bottom Layer w7: pad.23 4247.35,2826.43 4595.57,2826.43 4624.62,2797.38 U1.22
TTA-SEG13: pad.2 pad.22 U1.21 U*2.18 | length 793.4
  Top Layer w10: U*2.18 pad.22
  Bottom Layer w7: pad.22 4204.23,2814 4579,2814 4608.87,2784.13 U1.21
TTA-SEG14: pad.1 pad.21 U1.20 U*2.19 | length 823.4
  Top Layer w10: U*2.19 pad.1@4037.28,2925.91
  Bottom Layer w7: pad.21 4162.41,2800.96 4560.04,2800.96 4593.13,2767.87 U1.20
TTA-SEG15: pad.0 pad.20 U1.19 U*2.20 | length 848
  Top Layer w10: U*2.20 pad.0@3982.17,2921.83
  Bottom Layer w7: pad.20 4119.17,2789 4538,2789 4577.38,2749.62 U1.19
UART_RX: P1.8 pad.42 pad.45 U3.9 | length 2262.6
  Top Layer w7: v1(4185,2562) 4215,2592 4370,2592 4428,2650 4787,2650 4812,2675 v1(4838,2675)
  Bottom Layer w7: U3.9 4151.11,2528.11 v1(4185,2562) ; v1(4838,2675) 4838,2819 4925,2906 5060,2906 5077,2923 ; P1.8 5077,2923 ; v1(5932,2966) v1(5796,2966) 5499,2966 5456,2923 5077,2923
UART_TX: P1.10 pad.40 pad.43 U3.8 | length 2181.3
  Top Layer w7: v1(4094,2603) 4304,2603 4449,2748 4771,2748 4870,2847 5058,2847 5073,2862 5073,2908.09 5085.91,2921 5113,2921 5127,2935 P1.10
  Bottom Layer w7: U3.8 4045.88,2554.88 v1(4094,2603) ; P1.10 5148,2947 5436,2947 5511,3022 v1(5931,3022)
  other v1: 5795,3023
VBAT: B1.1 C21.2 C22.2 pad.56 R9.2 U4.3 U5.2 | length 1355.5
  Bottom Layer w7: U5.2@5360,2284 5496,2284 5507,2295 ; R9.2 5521.09,2419.09 5507,2405 5507,2295 ; R9.2@5585.63,2421.65 U4.3 ; C21.2 C22.2 pad.56 5817,2117 5517,2117 5507,2127 5507,2295 ; C21.2@5915.45,2286.39 B1.1
VCC3: ?.1@4845.93,3050.09 C1.2 C2.1 C5.1 C15.1 C16.1 C23.2 C24.2 H1.1 H2.1 LS1.1 P1.1 pad.57 R1.2 R8.2 U1.8 U3.12 U3.14 U5.3 | length 6371
  Top Layer w7: v1(3328.34,2401.34) 4357.66,2401.34 4371,2388 4371,2371 v1(4353,2353) ; v1(4493,2472.11) 4548,2417.11 4548,2385 4575,2358 4700,2358 v1(4709,2367) ; v1(4709,2268) 4767,2268 4852,2183 v1(4930,2183) ; ?.1@4845.93,3050.09 4925.91,3050.09 ; P1.1 4927,3093 4936,3102 5253,3102 5266,3089 5266,2653 5220,2607 5220,2413 5210,2403 5146,2403 5115.95,2433.05 LS1.1 ; v1(5118,2183) 5118,2083 5131,2070 5642,2070 5663.93,2091.93 v1(5663.93,2295.93)
  Bottom Layer w7: H2.1 3252,2339 3264.98,2351.98 C5.1@3329,2351.98 ; v1@3322.85,2404.51 ccw(c3306.55,2413.92) 3324.73,2418.79 ; v1@3325.17,2406.84 ccw(c3315.15,2424.19) 3334.51,2419 ; v1@3329,2401.34 H1.1 ; C5.1 3329.91,2437.07 C2.1 ; U3.14 3901.38,2496.76 3909.14,2489 3930.9,2489 3932.87,2490.97 ; U3.12 3932.87,2490.97 ; C16.1 4080.07,2411.54 ; U1.8 v1(4493,2472.11) 4413.11,2472.11 4402.07,2461.07 C1.2 4373.09,2431.09 4364,2422 4364,2364 v1(4353,2353) 4305.86,2305.86 4201.79,2305.86 4161.07,2346.59 C15.1 4162,2350.02 4162,2403 4153.46,2411.54 4080.07,2411.54 ; v1(4709,2268) v1(4709,2367) ; C24.2 C23.2 R1.2 v1@5118,2182.8 ; LS1.1 5106.95,2433.05 5118,2422 v1(5118,2183) ; 5186.8,2182.8 v1@5118,2182.8 ; U5.3@5315,2183 pad.57 v1(5118,2183) ; v1(5663.93,2295.93) R8.2 ; 3932.87,2490.97 3932.87,2441.13 3962.46,2411.54 4080.07,2411.54 ; v1@5118,2182.8 v1(5118,2183)
XTAL_16M_I: C13.2 U3.16 Y2.1 | length 395.5
  Bottom Layer w7: U3.16 3869.88,2477.88 3848,2456 3848,2314 3888.37,2273.63 Y2.1 3907.5,2284.91 C13.2
XTAL_16M_O: C12.2 U3.17 Y2.3 | length 327.7
  Bottom Layer w7: C12.2 Y2.3@3795.5,2350.09 ; Y2.3 3797.79,2435.79 3843.11,2481.11 U3.17
XTAL_32K_I: C10.2 U3.18 Y1.1 | length 691.5
  Bottom Layer w7: C10.2 3611.09,2147.91 3602.5,2156.5 Y1.1 3602.5,2399.5 3623,2420 3745,2420 3801,2476 3801,2558 3813.63,2570.63 U3.18
XTAL_32K_O: C8.2 U3.19 Y1.2 | length 712.2
  Bottom Layer w7: C8.2 3503.09,2213.09 3513.5,2223.5 Y1.2 3513.5,2434.5 3527,2448 3744.87,2448 3776,2479.13 3776,2561 3801.38,2586.38 U3.19
pads on no net: ?. _1. A1. A1.2@3738.68,2777 B1. CON1.3 CON1.4 P1.4 P1.6 U1.13 U1.14 U1.15 U1.16 U1.17 U1.18 U3.6 U3.13 U3.20
copper on no net: | length 972
  Top Layer w7: 5834,2954 v1(5834,2993) ; 5834,2959 5834,2800 5879.65,2754.35 v1(6074.65,2754.35) ; v1@5900,2991 5900,2807 5909.35,2797.65 v1(6075.35,2797.65)
  Bottom Layer w7: 5999.39,2754.35 v1(6074.65,2754.35) ; 5999.39,2797.65 v1(6075.35,2797.65)
  other v1: 5900,2992

## Polygon pours and split planes (outlines as drawn)
GND on Top Layer "BottomLayer-No Net" (solid, remove dead copper, pour order 4): 3136,2038 3136,3147 6259,3147 6259,2038 3136,2038
GND on Bottom Layer "BottomLayer-No Net" (solid, remove dead copper, pour order 2): 3136,2038 3136,3147 6259,3147 6259,2038 3136,2038

## Keep-outs
Keep-Out Layer:
  lines w5: 3787.15,2038 3787.15,2102.22 ; 3787.15,2038 4003.69,2038 ; 3787.15,2038 4003.69,2038 ; 3787.15,2038 3787.15,2102.22 ; 3787.15,2102.22 3787.15,2151.43 ; 3787.15,2102.22 3787.15,2151.43 ; 3787.15,2151.43 4003.69,2151.43 ; 3787.15,2151.43 4003.69,2151.43 ; 3787.15,2958.52 4003.69,2958.52 ; 3787.15,2958.52 3787.15,3007.73 ; 3787.15,2958.52 3787.15,3007.73 ; 3787.15,2958.52 4003.69,2958.52 ; 3787.15,3007.73 3787.15,3056.94 ; 3787.15,3007.73 3787.15,3056.94 ; 3787.15,3056.94 4003.69,3056.94 ; 3787.15,3056.94 4003.69,3056.94 ; 4003.69,2038 4003.69,2102.22 ; 4003.69,2038 4003.69,2102.22 ; 4003.69,2102.22 4003.69,2151.43 ; 4003.69,2102.22 4003.69,2151.43 ; 4003.69,2958.52 4003.69,3007.73 ; 4003.69,2958.52 4003.69,3007.73 ; 4003.69,3007.73 4003.69,3056.94 ; 4003.69,3007.73 4003.69,3056.94 ; 4535.18,2038 4535.18,2102.22 ; 4535.18,2038 4751.72,2038 ; 4535.18,2038 4751.72,2038 ; 4535.18,2038 4535.18,2102.22 ; 4535.18,2102.22 4535.18,2151.43 ; 4535.18,2102.22 4535.18,2151.43 ; 4535.18,2151.43 4751.72,2151.43 ; 4535.18,2151.43 4751.72,2151.43 ; 4535.18,2958.52 4751.72,2958.52 ; 4535.18,2958.52 4535.18,3007.73 ; 4535.18,2958.52 4535.18,3007.73 ; 4535.18,2958.52 4751.72,2958.52 ; 4535.18,3007.73 4535.18,3056.94 ; 4535.18,3007.73 4535.18,3056.94 ; 4535.18,3056.94 4751.72,3056.94 ; 4535.18,3056.94 4751.72,3056.94 ; 4751.72,2038 4751.72,2102.22 ; 4751.72,2038 4751.72,2102.22 ; 4751.72,2102.22 4751.72,2151.43 ; 4751.72,2102.22 4751.72,2151.43 ; 4751.72,2958.52 4751.72,3007.73 ; 4751.72,2958.52 4751.72,3007.73 ; 4751.72,3007.73 4751.72,3056.94 ; 4751.72,3007.73 4751.72,3056.94 ; 3136,2038 6259,2038 6259,3147 3136,3147 3136,2038

## Other copper
Top Layer:
  pour cut-out: 3778,3147 3780,2964 3778,2962 3784,2956 4752.77,2956 4752.77,3147
  pour cut-out: 4544,2151.48 4544,2303 4545,2304 3904,2304 3904,2152 4543,2152
  pour cut-out: 3916,2958.52 3916,2807 3915,2806 4556,2806 4556,2958 3917,2958
  pour cut-out: 3116,2783.89 3779.03,2783.89 3779.03,3165 3116,3165
Bottom Layer:
  pour cut-out: 3624,2784 cw(c3624,2765.84) 3642.16,2765.84 3642.16,2763.16 ccw(c3651.32,2763.16) 3651.32,2754 3660.68,2754 ccw(c3660.68,2763.16) 3669.84,2763.16 cw(c3690.68,2763.16) 3690.68,2784 3691,2784 cw(c3691,2764.04) 3710.96,2764.04 3710.96,2760.04 ccw(c3718,2760.04) 3718,2753 3760.35,2753 ccw(c3760.35,2759.04) 3766.39,2759.04 3766.39,2771.25 cw(c3779.03,2771.25) 3779.03,2783.89 3779.03,2789.97 ccw(c3767,2789.97) 3767,2802 3630,2802 ccw(c3630,2796) 3624,2796
  pour cut-out: 3777.8,3147 3777.8,3180.96 3777.8,2953.5 4749,2953.5 4749,3147
  pour cut-out: 3116,2783.89 3779.03,2783.89 3779.03,3163 3116,3163

## Silkscreen, mask and mechanical layers (free items; w line width, h text height)
Top Overlay:
  lines w7.87: 3679.08,2287.12 3679.08,2822.55 4923.18,2822.55 4923.18,2287.12 3679.08,2287.12
  text "VCC3" at 4877,3106 h27.56
  text "1" at 4920,3070 h27.56
  text "TX" at 5978,2985 h39.37
  text "RX" at 5671,2973 h39.37
  text "10" at 5108,2883 h27.56
  text "-" at 4965,2590 h27.56 r90
  text "+" at 4943,2493 h27.56
Bottom Overlay:
  text "WRB" at 3958,2904 h27.56 r90
  text "VLCD" at 3827,2901 h27.56 r90
  text "DAT" at 3879,2898 h27.56 r90
  text "CSB" at 4043,2813 h27.56
  text "VCC5" at 5792,2680 h27.56
  text "GND" at 5851,2544 h27.56
  text "VCC3" at 5270,2121 h27.56
  text "BAT" at 5849,2057 h27.56
Top Solder:
  rectangle: 3178,2787 3776,2991
Bottom Solder:
  rectangle: 3178,2787 3776,2991
Mechanical 1:
  lines w5: 3136,2038 6259,2038 6259,3147 3136,3147 3136,2038 ; 3787.15,2038 3787.15,2102.22 3787.15,2151.43 4003.69,2151.43 4003.69,2102.22 4003.69,2038 3787.15,2038 ; 3787.15,2958.52 4003.69,2958.52 4003.69,3007.73 4003.69,3056.94 3787.15,3056.94 3787.15,3007.73 3787.15,2958.52 ; 4535.18,2038 4535.18,2102.22 4535.18,2151.43 4751.72,2151.43 4751.72,2102.22 4751.72,2038 4535.18,2038 ; 4535.18,2958.52 4751.72,2958.52 4751.72,3007.73 4751.72,3056.94 4535.18,3056.94 4535.18,3007.73 4535.18,2958.52